# Altium PCB EN-C200_RA2.PcbDoc (part 2 of 3)
Units mil, origin at the board's own origin, x right, y up, seen from the top; angles counter-clockwise.
Board outline 4940 x 2525 mil, 2 copper layers (TOP, BOTTOM), stack 39.8 mil thick; 190 components, 128 nets, 643 pads, 1902 vias.
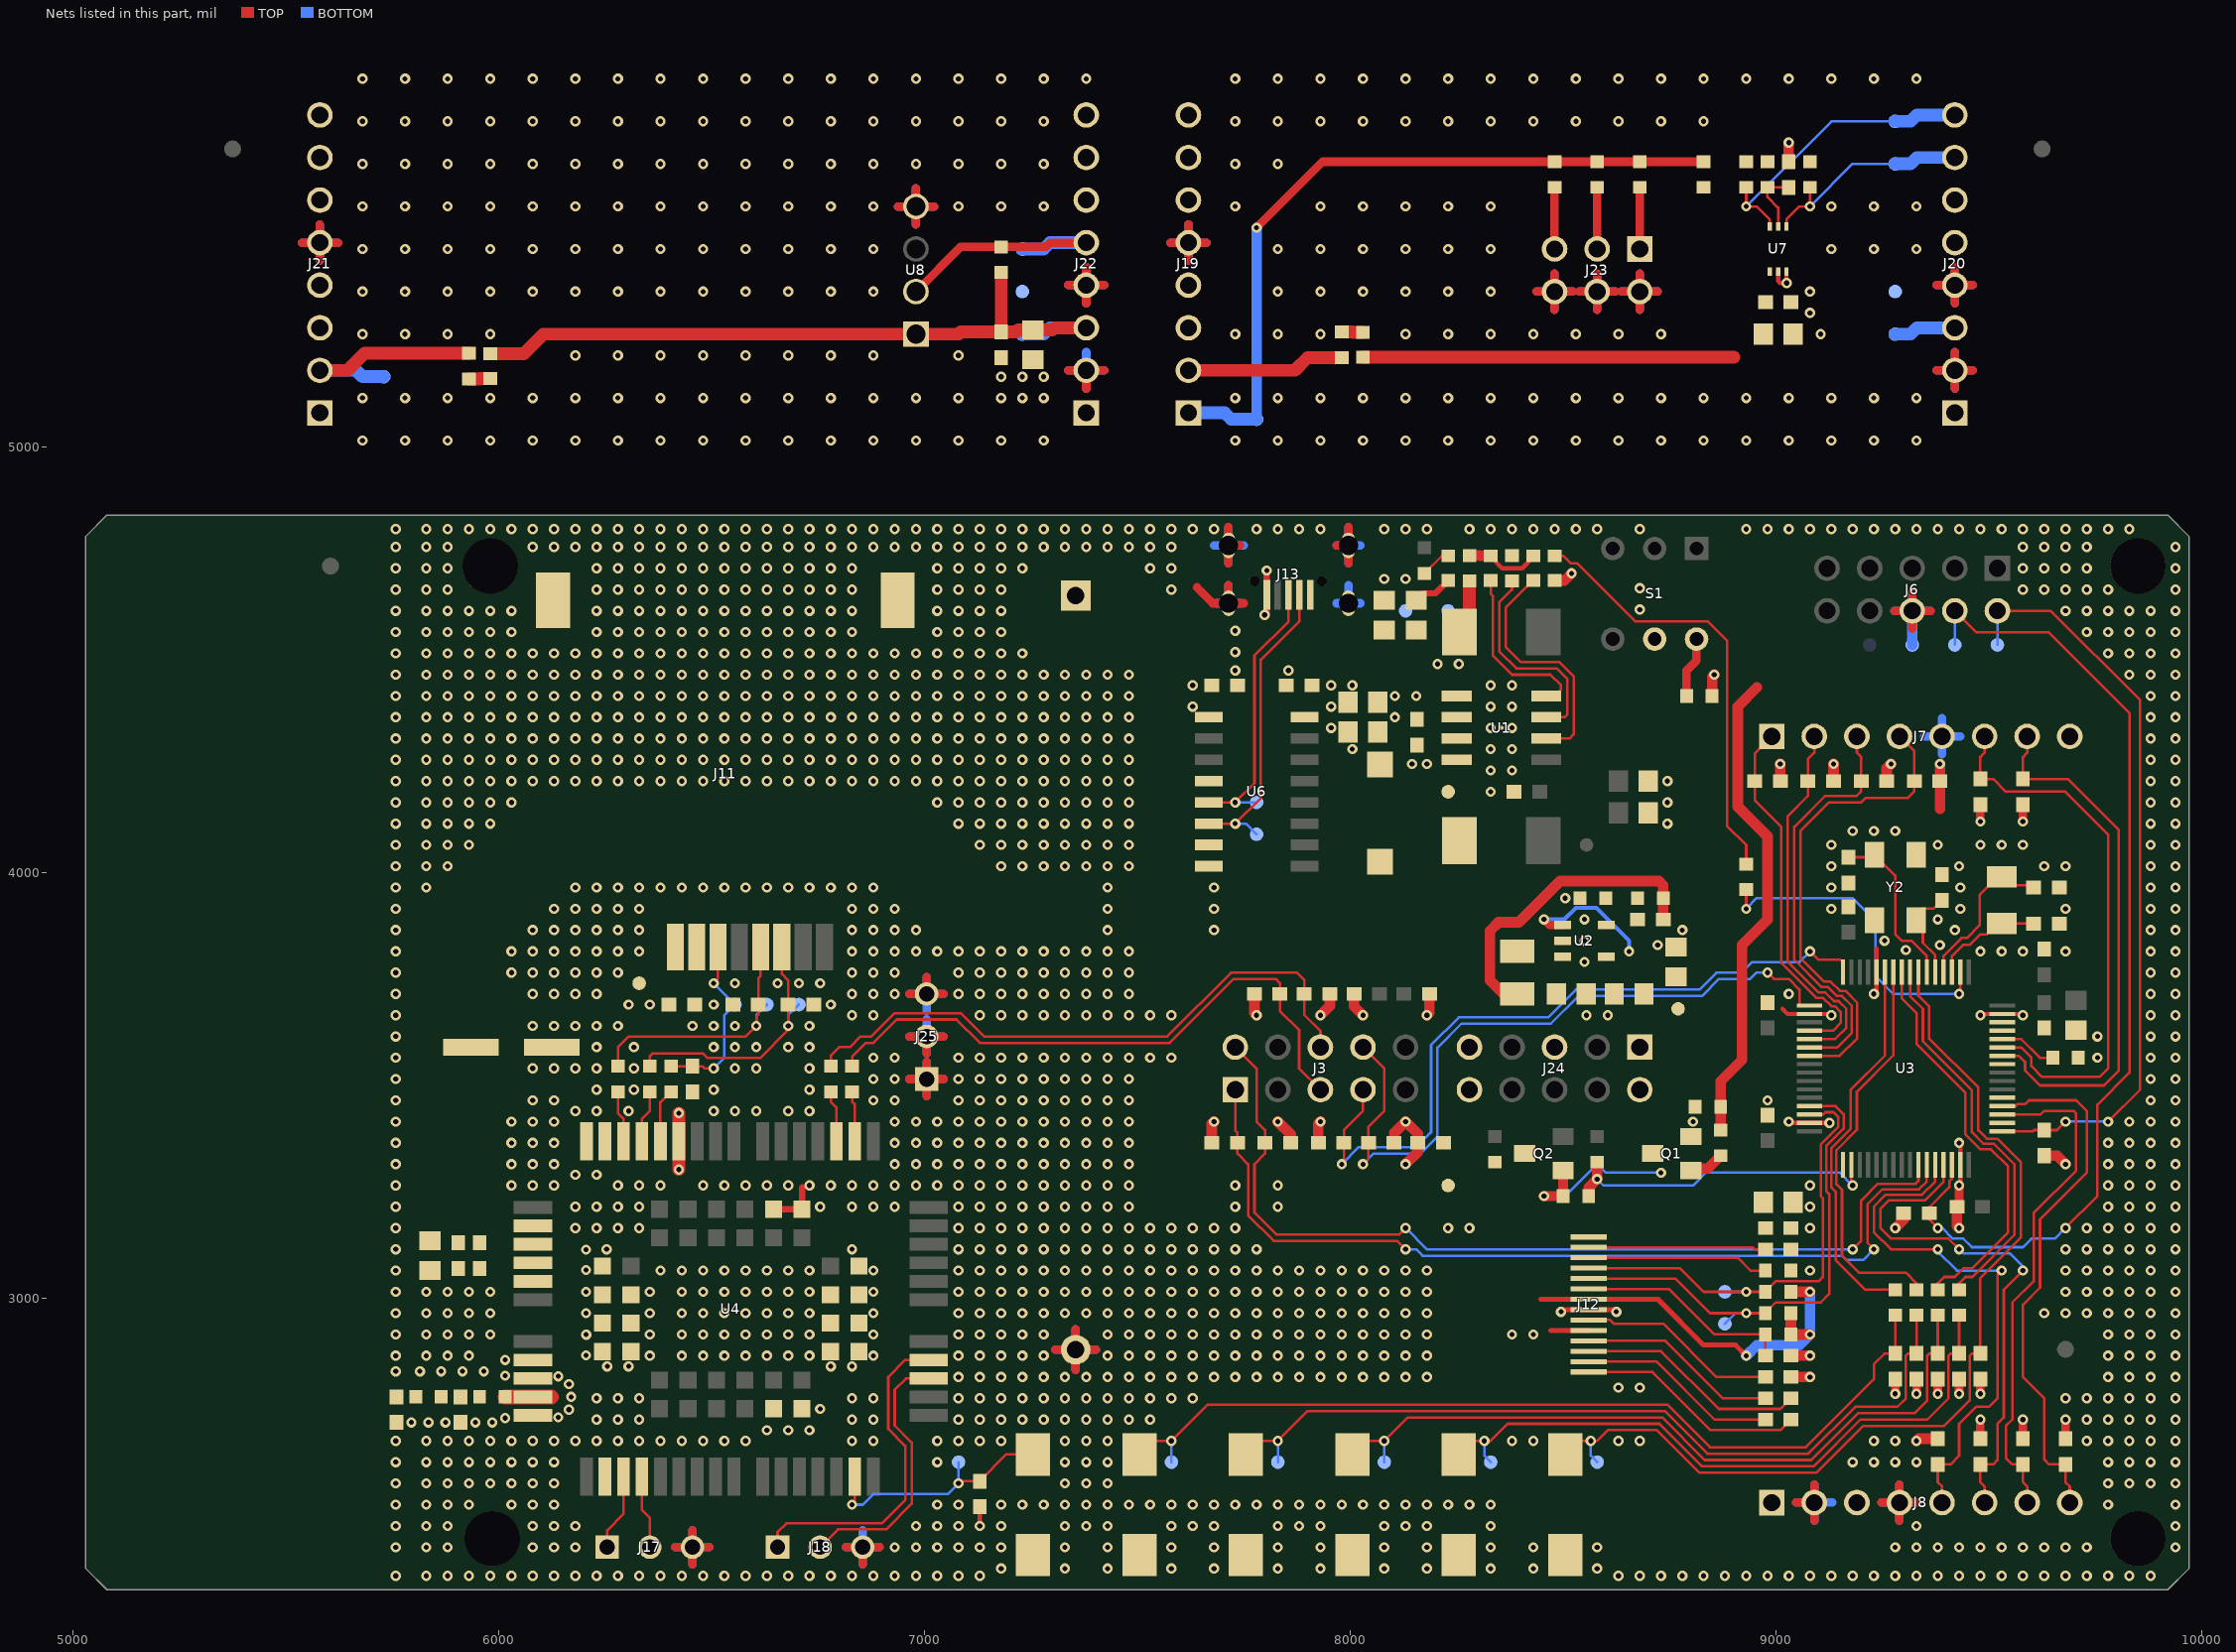
[diagram p2: the nets of this part, all layers, seen from the top]

## Via types
v1: diameter 24, hole 12, TOP to BOTTOM, tented both sides, 1902 vias

## Nets (pads, with @x,y where several pads share a name; then routed paths per layer and width w, separated by ;. In a path a pad name is that pad's centre, name@x,y a point inside that pad or via, vN(x,y) a via of type N, cw(c..) or ccw(c..) an arc to the next point about the centre after c; other vN are vias at no path point) (continued)
GND: C1.2 C2.2 C3.2 C4.2 C5.1 C8.2 C9.2 C11.2 C12.2 C13.1 C14.1 C15.2 C16.1 C17.1 C18.1 C19.1 C20.1 C21.2 C22.2 C23.2 C24.2 C25.2 C26.2 C28.1 C29.1 C30.1 C31.1 C32.1 C33.2 C34.2 C35.2 C36.2 C37.1 C39.1 C41.1 C42.1 C43.1 C44.1 C45.2 C46.1 C47.1 C48.1 C49.1 C50.1 C51.1 C52.1 C53.1 C54.1 C55.1 C56.1 C57.1 C58.1 C59.1 C60.1 C62.1 C63.1 C64.1 C65.1 C66.1 C67.1 C68.1 C69.1 C70.2 C71.2 C72.2 C73.2 C74.2 C75.2 C76.2 C77.2 E1.2 J6.6 J7.5 J8.2 J8.4 J11.2 J11.9 J11.10 J12.7 J13.5 J13.6 J13.7 J13.8 J13.9 J15.2 J17.3 J18.3 J19.5 J20.2 J20.4 J21.5 J22.2 J22.4 J23.2 J23.4 J23.6 J25.1 J25.2 J25.3 LED3.2 LED4.2 Q1.2 R2.1 R3.1 R5.1 R10.1 R27.1 R59.2 S2.2 S3.2 S4.2 S5.2 S6.2 S7.1 TP49.1 TP51.1 TP53.1 TP60.1 U1.7 U1.9 U2.2 U3.12 U3.18 U3.31 U3.47 U3.63 U4.2 U4.42 U4.43 U4.47 U4.48 U4.51 U4.52 U4.54 U4.59 U4.60 U4.61 U4.62 U4.63 U4.64 U4.65 U4.66 U4.71 U4.72 U4.73 U4.74 U4.81 U4.82 U4.83 U4.92 U4.93 U4.94 U6.1 U7.2 U7.3 U8.4 Y2.2 Y2.4 | length 10058.4
  TOP w10: v1(7130,2465) C37.1@7130,2510 ; U7.2@9005,5411.85 9005,5390 9010,5385 ; 9015,3680 9027.05,3667.95 U3.18@9078.62,3667.95 9127.05,3667.95 v1(9130,3665) ; v1@9024.68,5385.31 U7.3@9024.68,5411.85 ; v1(9030,3415) 9032.95,3412.05 U3.31@9078.62,3412.05 v1(9125.62,3412.05) 9127.05,3412.05 v1@9130,3415 ; v1(9230,3715) 9236.1,3721.1 U3.12@9236.1,3766.38 9236.1,3821.1 ; v1(9430,3265) 9432.95,3267.95 U3.47@9432.95,3313.62 9432.95,3362.05 v1(9430,3365) ; v1(9480,3665) 9482.95,3667.95 U3.63@9531.38,3667.95 9577.05,3667.95 v1(9580,3665)
  TOP w12: v1(8495,2968.14) 8500,2973.14 J12.7@8560.04,2973.14 8620,2973.14 v1(8625,2968.14)
  TOP w15: U4.66@6645.39,3209.25 U4.65@6712.32,3209.25 6712.32,3260 ; v1(7798.82,4605.56) 7803.82,4610.56 J13.5@7803.82,4652.56 v1(7803.82,4709.56) ; C1.2@8155,4640 8171.11,4656.11 8200.11,4656.11 LED3.2@8230,4686 ; v1@9024.68,5385.31 v1(9025,5385)
  TOP w20: 5537.5,5480 J21.5@5580,5480 ; 5580,5437.5 J21.5@5580,5480 ; 5580,5522.5 J21.5@5580,5480 ; 5622.5,5480 J21.5@5580,5480 ; 6415,2415 J17.3@6455,2415 ; 6455,2375 J17.3@6455,2415 ; 6455,2455 J17.3@6455,2415 ; 6495,2415 J17.3@6455,2415 ; 6815,2415 J18.3@6855,2415 ; 6855,2375 J18.3@6855,2415 ; 6895,2415 J18.3@6855,2415 ; 6937.5,5565 U8.4@6980,5565 ; 6965,3515 J25.1@7005,3515 ; 6965,3615 J25.2@7005,3615 ; 6965,3715 J25.3@7005,3715 ; 6980,5522.5 U8.4@6980,5565 ; 6980,5607.5 U8.4@6980,5565 ; 7005,3475 J25.1@7005,3515 ; 7005,3555 J25.1@7005,3515 ; 7005,3575 J25.2@7005,3615 ; 7005,3755 J25.3@7005,3715 ; 7022.5,5565 U8.4@6980,5565 ; 7045,3515 J25.1@7005,3515 ; 7045,3615 J25.2@7005,3615 ; 7045,3715 J25.3@7005,3715 ; 7307.5,2879.17 J15.2@7355,2879.17 ; 7337.5,5180 J22.2@7380,5180 ; 7337.5,5380 J22.4@7380,5380 ; 7355,2831.67 J15.2@7355,2879.17 ; 7355,2926.68 J15.2@7355,2879.17 ; 7380,5137.5 J22.2@7380,5180 ; 7380,5337.5 J22.4@7380,5380 ; 7380,5422.5 J22.4@7380,5380 ; 7402.5,2879.17 J15.2@7355,2879.17 ; 7422.5,5180 J22.2@7380,5180 ; 7422.5,5380 J22.4@7380,5380 ; 7577.5,5480 J19.5@7620,5480 ; 7620,5437.5 J19.5@7620,5480 ; 7620,5522.5 J19.5@7620,5480 ; 7640,4670 7677.13,4632.87 J13.9@7714.25,4632.87 ; 7662.5,5480 J19.5@7620,5480 ; 7714.25,4675.38 J13.9@7714.25,4632.87 ; 7714.25,4726.2 J13.8@7714.25,4768.7 ; 7714.25,4811.2 J13.8@7714.25,4768.7 ; 7741.75,4768.7 J13.8@7714.25,4768.7 ; 7750,4632.87 J13.9@7714.25,4632.87 ; 7968.25,4768.7 J13.7@7995.75,4768.7 ; 7995.75,4726.2 J13.7@7995.75,4768.7 ; 7995.75,4811.2 J13.7@7995.75,4768.7 ; 8437.5,5365 J23.6@8480,5365 ; 8480,5322.5 J23.6@8480,5365 ; 8480,5407.5 J23.6@8480,5365 ; 8522.5,5365 J23.6@8480,5365 ; 8537.5,5365 J23.4@8580,5365 ; 8580,5322.5 J23.4@8580,5365 ; 8580,5407.5 J23.4@8580,5365 ; 8622.5,5365 J23.4@8580,5365 ; 8637.5,5365 J23.2@8680,5365 ; 8680,5322.5 J23.2@8680,5365 ; 8680,5407.5 J23.2@8680,5365 ; 8722.5,5365 J23.2@8680,5365 ; 9047.5,2520 J8.2@9090,2520 ; 9090,2477.5 J8.2@9090,2520 ; 9090,2562.5 J8.2@9090,2520 ; 9247.5,2520 J8.4@9290,2520 ; 9277.5,4615 J6.6@9320,4615 ; v1(9280,2775.5) C26.2@9280,2810 ; 9290,2477.5 J8.4@9290,2520 ; 9290,2562.5 J8.4@9290,2520 ; 9320,4572.5 J6.6@9320,4615 ; 9320,4657.5 J6.6@9320,4615 ; v1(9330,2775.5) C25.2@9330,2810 ; 9332.5,2520 J8.4@9290,2520 ; 9362.5,4615 J6.6@9320,4615 ; 9377.5,5180 J20.2@9420,5180 ; 9377.5,5380 J20.4@9420,5380 ; v1(9380,2775.5) C24.2@9380,2810 ; 9420,5137.5 J20.2@9420,5180 ; 9420,5222.5 J20.2@9420,5180 ; 9420,5337.5 J20.4@9420,5380 ; 9420,5422.5 J20.4@9420,5380 ; C16.1@9425,3215 9430,3220 v1(9430,3265) ; v1(9430,2775.5) C23.2@9430,2810 ; 9462.5,5180 J20.2@9420,5180 ; 9462.5,5380 J20.4@9420,5380 ; C66.1@9480,2670 v1(9480,2715) ; v1(9480,2775.5) C22.2@9480,2810 ; v1(9480,4120) C62.1@9480,4160 ; C65.1@9580,2670 v1(9580,2715) ; v1(9580,4120) C63.1@9580,4160 ; C64.1@9680,2670 v1(9680,2715)
  TOP w24: LED4.2@8480,4686 8503,4686 v1(8520,4703)
  TOP w25: C49.1@7675,3365 7675,3410 v1(7680,3415) ; C51.1@7775,3715 7775,3670 v1(7780,3665) ; v1(7830,3415) 7860,3385 C56.1@7860,3365 ; C52.1@7925,3365 7925,3410 v1(7930,3415) ; v1(7930,3665) 7952,3687 C54.1@7952,3715 ; C50.1@8009,3715 8009,3686 v1(8030,3665) ; C53.1@8103,3365 8103,3388 v1(8130,3415) 8159,3386 C39.1@8159,3365 8159,3344 v1(8130,3315) ; v1(8180,3665) 8186,3671 C55.1@8186,3715 ; R3.1@8850,4415 8850,4460 v1(8855,4465) ; C57.1@9010,4215 v1(9010,4255) ; C73.2@9030,5670 v1(9030,5715) ; C41.1@9035,2815 v1(9080,2815) ; C43.1@9035,2865 v1(9080,2865) ; C58.1@9135,4215 v1(9135,4255) ; C59.1@9260,4215 9260,4245 v1(9270,4255) ; v1(9280,3165) 9300,3185 C68.1@9300,3200 ; v1(9330,2665) 9335,2670 C67.1@9380,2670 ; 9385,4150 v1(9385,4255) ; C16.1@9425,3215 9425,3170 v1(9430,3165) ; C69.1@9630,3335 9660,3335 v1(9680,3315)
  BOTTOM w20: 5537.5,5480 J21.5@5580,5480 ; 5580,5437.5 J21.5@5580,5480 ; 5580,5522.5 J21.5@5580,5480 ; 5622.5,5480 J21.5@5580,5480 ; 6415,2415 J17.3@6455,2415 ; 6455,2375 J17.3@6455,2415 ; 6455,2455 J17.3@6455,2415 ; 6495,2415 J17.3@6455,2415 ; 6815,2415 J18.3@6855,2415 ; 6855,2375 J18.3@6855,2415 ; 6855,2455 J18.3@6855,2415 ; 6895,2415 J18.3@6855,2415 ; 6937.5,5565 U8.4@6980,5565 ; 6965,3515 J25.1@7005,3515 ; 6965,3615 J25.2@7005,3615 ; 6965,3715 J25.3@7005,3715 ; 6980,5522.5 U8.4@6980,5565 ; 6980,5607.5 U8.4@6980,5565 ; 7005,3475 J25.1@7005,3515 ; 7005,3555 J25.1@7005,3515 ; 7005,3575 J25.2@7005,3615 ; 7005,3655 J25.2@7005,3615 ; 7005,3675 J25.3@7005,3715 ; 7005,3755 J25.3@7005,3715 ; 7022.5,5565 U8.4@6980,5565 ; 7045,3515 J25.1@7005,3515 ; 7045,3615 J25.2@7005,3615 ; 7045,3715 J25.3@7005,3715 ; 7307.5,2879.17 J15.2@7355,2879.17 ; 7337.5,5180 J22.2@7380,5180 ; 7337.5,5380 J22.4@7380,5380 ; 7355,2831.67 J15.2@7355,2879.17 ; 7355,2926.68 J15.2@7355,2879.17 ; 7380,5137.5 J22.2@7380,5180 ; 7380,5222.5 J22.2@7380,5180 ; 7380,5337.5 J22.4@7380,5380 ; 7380,5422.5 J22.4@7380,5380 ; 7402.5,2879.17 J15.2@7355,2879.17 ; 7422.5,5180 J22.2@7380,5180 ; 7422.5,5380 J22.4@7380,5380 ; 7577.5,5480 J19.5@7620,5480 ; 7620,5437.5 J19.5@7620,5480 ; 7620,5522.5 J19.5@7620,5480 ; 7662.5,5480 J19.5@7620,5480 ; 7680,4768.7 J13.8@7714.25,4768.7 ; 7686.75,4632.87 J13.9@7714.25,4632.87 ; 7714.25,4675.38 J13.9@7714.25,4632.87 ; 7714.25,4726.2 J13.8@7714.25,4768.7 ; 7714.25,4811.2 J13.8@7714.25,4768.7 ; 7741.75,4632.87 J13.9@7714.25,4632.87 ; 7750,4768.7 J13.8@7714.25,4768.7 ; 7968.25,4632.87 J13.6@7995.75,4632.87 ; 7968.25,4768.7 J13.7@7995.75,4768.7 ; 7995.75,4675.38 J13.6@7995.75,4632.87 ; 7995.75,4726.2 J13.7@7995.75,4768.7 ; 7995.75,4811.2 J13.7@7995.75,4768.7 ; 8023.25,4632.87 J13.6@7995.75,4632.87 ; 8023.25,4768.7 J13.7@7995.75,4768.7 ; 8437.5,5365 J23.6@8480,5365 ; 8480,5322.5 J23.6@8480,5365 ; 8480,5407.5 J23.6@8480,5365 ; 8522.5,5365 J23.6@8480,5365 ; 8537.5,5365 J23.4@8580,5365 ; 8580,5322.5 J23.4@8580,5365 ; 8580,5407.5 J23.4@8580,5365 ; 8622.5,5365 J23.4@8580,5365 ; 8637.5,5365 J23.2@8680,5365 ; 8680,5322.5 J23.2@8680,5365 ; 8680,5407.5 J23.2@8680,5365 ; 8722.5,5365 J23.2@8680,5365 ; 9047.5,2520 J8.2@9090,2520 ; 9090,2477.5 J8.2@9090,2520 ; 9090,2562.5 J8.2@9090,2520 ; 9132.5,2520 J8.2@9090,2520 ; 9247.5,2520 J8.4@9290,2520 ; 9277.5,4615 J6.6@9320,4615 ; 9290,2477.5 J8.4@9290,2520 ; 9290,2562.5 J8.4@9290,2520 ; 9320,4657.5 J6.6@9320,4615 ; 9332.5,2520 J8.4@9290,2520 ; 9347.5,4320 J7.5@9390,4320 ; 9362.5,4615 J6.6@9320,4615 ; 9377.5,5180 J20.2@9420,5180 ; 9377.5,5380 J20.4@9420,5380 ; 9390,4277.5 J7.5@9390,4320 ; 9390,4362.5 J7.5@9390,4320 ; 9420,5137.5 J20.2@9420,5180 ; 9420,5222.5 J20.2@9420,5180 ; 9420,5337.5 J20.4@9420,5380 ; 9420,5422.5 J20.4@9420,5380 ; 9432.5,4320 J7.5@9390,4320 ; 9462.5,5180 J20.2@9420,5180 ; 9462.5,5380 J20.4@9420,5380
  BOTTOM w25: TP49.1@9320,4535 J6.6@9320,4615
  other v1: 5758,2348 5830,2348 5880,2348 5930,2348 5980,2348 6030,2348 6080,2348 6130,2348 6180,2348 6230,2348 6280,2348 6330,2348 6380,2348 6430,2348 6480,2348 6530,2348 6580,2348 6630,2348 6680,2348 6730,2348 6780,2348 6830,2348 6880,2348 6930,2348 6980,2348 7030,2348 7080,2348 7130,2348 8630,2348 8680,2348 8730,2348 8780,2348 8830,2348 8880,2348 8930,2348 8980,2348 9030,2348 9080,2348 9130,2348 9180,2348 9230,2348 9280,2348 9330,2348 9380,2348 9430,2348 9480,2348 9530,2348 9580,2348 9630,2348 9680,2348 9730,2348 9780,2348 9830,2348 9880,2348 7180,2365 7330,2365 7430,2365 7580,2365 7680,2365 7830,2365 7930,2365 8080,2365 8180,2365 8330,2365 8430,2365 8580,2365 5758,2415 5830,2415 5880,2415 6080,2415 6130,2415 6180,2415 6930,2415 6980,2415 7030,2415 7080,2415 7130,2415 7180,2415 7330,2415 7430,2415 7580,2415 7680,2415 7830,2415 7930,2415 8080,2415 8180,2415 8330,2415 8430,2415 8580,2415 9280,2415 9330,2415 9380,2415 9430,2415 9480,2415 9530,2415 9580,2415 9630,2415 9680,2415 9730,2415 9938,2415 5758,2465 5830,2465 5880,2465 6080,2465 6130,2465 6180,2465 6980,2465 7030,2465 7080,2465 7180,2465 7330,2465 7380,2465 7430,2465 7580,2465 7630,2465 7680,2465 7830,2465 7880,2465 7930,2465 8080,2465 8130,2465 8180,2465 8330,2465 9330,2465 9938,2465 5758,2515 5830,2515 5880,2515 5930,2515 6030,2515 6080,2515 6130,2515 7030,2515 7080,2515 7180,2515 7230,2515 7280,2515 7330,2515 7380,2515 7430,2515 7480,2515 7530,2515 7580,2515 7630,2515 7680,2515 7730,2515 7780,2515 7830,2515 7880,2515 7930,2515 7980,2515 8030,2515 8080,2515 8130,2515 8180,2515 8230,2515 8280,2515 8330,2515 9780,2515 9938,2515 5758,2565 5830,2565 5880,2565 5930,2565 5980,2565 6030,2565 6080,2565 6130,2565 7330,2565 7380,2565 7430,2565 9780,2565 9830,2565 9880,2565 9938,2565 5758,2615 5830,2615 5880,2615 5930,2615 5980,2615 6030,2615 6080,2615 6130,2615 7030,2615 7330,2615 7380,2615 7430,2615 9180,2615 9230,2615 9280,2615 9330,2615 9780,2615 9830,2615 9880,2615 9938,2615 5758,2665 5830,2665 5880,2665 5930,2665 5980,2665 6030,2665 6080,2665 6130,2665 6180,2665 6230,2665 6280,2665 6330,2665 6380,2665 6430,2665 6480,2665 6530,2665 6580,2665 6830,2665 6880,2665 7030,2665 7080,2665 7130,2665 7180,2665 7330,2665 7380,2665 7430,2665 9230,2665 9280,2665 9730,2665 9780,2665 9830,2665 9880,2665 9938,2665 6630,2690 6680,2690 6730,2690 5795,2708.31 5835,2708.31 5875,2708.31 5945,2708.31 5985,2708.31 6230,2715 6280,2715 6330,2715 6830,2715 6880,2715 7080,2715 7130,2715 7180,2715 7230,2715 7280,2715 7330,2715 7380,2715 7430,2715 7480,2715 7530,2715 9730,2715 9780,2715 9830,2715 9880,2715 9938,2715 6015,2718.31 6140,2720 6165,2738.31 6755,2740 6230,2765 6280,2765 6330,2765 6830,2765 6880,2765 7080,2765 7130,2765 7180,2765 7230,2765 7280,2765 7330,2765 7380,2765 7430,2765 7480,2765 7530,2765 7580,2765 7630,2765 9680,2765 9730,2765 9780,2765 9830,2765 9880,2765 9938,2765 6170,2768.31 6165,2798.31 7080,2815 7130,2815 7180,2815 7230,2815 7280,2815 7330,2815 7380,2815 7430,2815 7480,2815 7530,2815 7580,2815 7630,2815 7680,2815 7730,2815 7780,2815 7830,2815 7880,2815 7930,2815 7980,2815 8030,2815 8080,2815 8130,2815 8180,2815 9780,2815 9830,2815 9880,2815 9938,2815 6140,2816.61 6015,2818.31 5758,2828.31 5815,2828.31 5865,2828.31 5915,2828.31 5965,2828.31 6255,2840 6305,2840 6780,2840 6830,2840 6015,2855 5758,2865 5830,2865 5880,2865 5930,2865 6355,2865 6430,2865 6480,2865 6530,2865 6580,2865 6630,2865 6680,2865 6730,2865 6880,2865 7080,2865 7130,2865 7180,2865 7230,2865 7280,2865 7430,2865 7480,2865 7530,2865 7580,2865 7630,2865 7680,2865 7730,2865 7780,2865 7830,2865 7880,2865 7930,2865 7980,2865 8030,2865 8080,2865 8130,2865 8180,2865 9780,2865 9830,2865 9880,2865 9938,2865 6205,2865.79 6205.54,2914.46 5758,2915 5830,2915 5880,2915 5930,2915 5980,2915 6355,2915 6430,2915 6480,2915 6530,2915 6580,2915 6630,2915 6680,2915 6730,2915 6880,2915 7080,2915 7130,2915 7180,2915 7230,2915 7280,2915 7430,2915 7480,2915 7530,2915 7580,2915 7630,2915 7680,2915 7730,2915 7780,2915 7830,2915 7880,2915 7930,2915 7980,2915 8030,2915 8080,2915 8130,2915 8180,2915 9780,2915 9830,2915 9880,2915 9938,2915 5758,2965 5830,2965 5880,2965 5930,2965 5980,2965 6205,2965 6355,2965 6430,2965 6480,2965 6530,2965 6580,2965 6630,2965 6680,2965 6730,2965 6880,2965 7080,2965 7130,2965 7180,2965 7230,2965 7280,2965 7330,2965 7380,2965 7430,2965 7480,2965 7530,2965 7580,2965 7630,2965 7680,2965 7730,2965 7780,2965 7830,2965 7880,2965 7930,2965 7980,2965 8030,2965 8080,2965 8130,2965 8180,2965 9630,2965 9680,2965 9730,2965 9780,2965 9830,2965 9880,2965 9938,2965 5758,3015 5830,3015 5880,3015 5930,3015 5980,3015 6205,3015 6355,3015 6430,3015 6480,3015 6530,3015 6580,3015 6630,3015 6680,3015 6730,3015 6880,3015 7080,3015 7130,3015 7180,3015 7230,3015 7280,3015 7330,3015 7380,3015 7430,3015 7480,3015 7530,3015 7580,3015 7630,3015 7680,3015 7730,3015 7780,3015 7830,3015 7880,3015 7930,3015 7980,3015 8030,3015 8080,3015 8130,3015 8180,3015 9680,3015 9730,3015 9780,3015 9830,3015 9880,3015 9938,3015 5758,3065 6380,3065 6430,3065 6480,3065 6530,3065 6580,3065 6630,3065 6680,3065 6730,3065 6880,3065 7080,3065 7130,3065 7180,3065 7230,3065 7280,3065 7330,3065 7380,3065 7430,3065 7480,3065 7530,3065 7580,3065 7630,3065 7680,3065 7730,3065 7780,3065 7830,3065 7880,3065 7930,3065 7980,3065 8030,3065 8080,3065 8130,3065 8180,3065 9080,3065 9680,3065 9730,3065 9780,3065 9830,3065 9880,3065 9938,3065 6205,3066.57 6205,3114.21 5758,3115 6253.43,3115 6830,3115 7080,3115 7130,3115 7180,3115 7230,3115 7280,3115 7330,3115 7380,3115 7430,3115 7480,3115 7530,3115 7580,3115 7630,3115 7680,3115 7730,3115 7780,3115 9680,3115 9730,3115 9780,3115 9830,3115 9880,3115 9938,3115 5758,3165 6180,3165 6230,3165 6280,3165 6330,3165 7080,3165 7130,3165 7180,3165 7230,3165 7280,3165 7330,3165 7380,3165 7430,3165 7480,3165 7530,3165 7580,3165 7630,3165 7680,3165 7730,3165 9080,3165 9730,3165 9780,3165 9830,3165 9880,3165 9938,3165 5758,3215 6180,3215 6230,3215 6280,3215 6330,3215 6755,3215 6830,3215 6880,3215 6930,3215 7080,3215 7130,3215 7180,3215 7230,3215 7280,3215 7330,3215 7380,3215 7430,3215 7480,3215 9080,3215 9780,3215 9830,3215 9880,3215 9938,3215 5758,3265 6030,3265 6080,3265 6130,3265 6280,3265 6330,3265 6380,3265 6480,3265 6530,3265 6580,3265 6630,3265 6680,3265 6730,3265 6780,3265 6830,3265 6880,3265 6930,3265 6980,3265 7030,3265 7080,3265 7130,3265 7180,3265 7230,3265 7280,3265 7330,3265 7380,3265 7430,3265 7480,3265 9080,3265 9780,3265 9830,3265 9880,3265 9938,3265 6180,3290 6230,3290 5758,3315 6030,3315 6080,3315 6130,3315 6930,3315 6980,3315 7030,3315 7080,3315 7130,3315 7180,3315 7230,3315 7280,3315 7330,3315 7380,3315 7430,3315 7480,3315 9780,3315 9830,3315 9880,3315 9938,3315 5758,3365 6030,3365 6080,3365 6130,3365 6930,3365 6980,3365 7030,3365 7080,3365 7130,3365 7180,3365 7230,3365 7280,3365 7330,3365 7380,3365 7430,3365 7480,3365 9780,3365 9830,3365 9880,3365 9938,3365 5758,3415 6030,3415 6080,3415 6130,3415 6930,3415 6980,3415 7030,3415 7080,3415 7130,3415 7180,3415 7230,3415 7280,3415 7330,3415 7380,3415 7430,3415 7480,3415 8805,3415 9830,3415 9880,3415 9938,3415 6180,3440 6230,3440 6305,3440 6505,3440 6555,3440 6605,3440 6680,3440 6730,3440 5758,3465 6080,3465 6130,3465 6880,3465 6930,3465 7080,3465 7130,3465 7180,3465 7230,3465 7280,3465 7330,3465 7380,3465 7430,3465 7480,3465 8980,3465 9880,3465 9938,3465 6230,3490 6317.5,3490 6505,3490 6730,3490 5758,3515 6880,3515 6930,3515 7080,3515 7130,3515 7180,3515 7230,3515 7280,3515 7330,3515 7380,3515 7430,3515 7480,3515 9880,3515 9938,3515 6080,3540 6130,3540 6180,3540 6230,3540 6317.5,3540 6555,3540 6605,3540 6730,3540 5758,3565 6880,3565 6930,3565 7080,3565 7130,3565 7180,3565 7230,3565 7280,3565 7330,3565 7380,3565 7430,3565 7480,3565 9755,3565 9880,3565 9938,3565 6230,3590 6317.5,3590 6505,3590 6555,3590 6605,3590 6680,3590 6730,3590 5758,3615 9755,3615 9880,3615 9938,3615 6080,3640 6130,3640 6180,3640 6230,3640 6280,3640 6455,3640 6505,3640 6555,3640 6730,3640 5758,3665 6830,3665 6880,3665 7130,3665 7180,3665 7230,3665 7280,3665 7330,3665 7380,3665 7430,3665 7480,3665 8555,3665 8605,3665 9880,3665 9938,3665 6505,3690 6780,3690 5758,3715 6080,3715 6130,3715 6180,3715 6230,3715 6830,3715 6880,3715 6930,3715 7080,3715 7130,3715 7180,3715 7230,3715 7280,3715 7330,3715 7380,3715 7430,3715 7480,3715 9030,3715 9880,3715 9938,3715 6555,3740 6655,3740 6705,3740 6755,3740 5758,3765 6030,3765 6080,3765 6130,3765 6180,3765 6230,3765 6280,3765 6830,3765 6880,3765 6930,3765 7080,3765 7130,3765 7180,3765 7230,3765 7280,3765 7330,3765 7380,3765 7430,3765 7480,3765 9880,3765 9938,3765 8550,3790 5758,3815 6030,3815 6080,3815 6130,3815 6180,3815 6230,3815 6280,3815 6330,3815 6830,3815 6880,3815 6930,3815 6980,3815 7030,3815 7080,3815 7130,3815 7180,3815 7230,3815 7280,3815 7330,3815 7380,3815 7430,3815 7480,3815 9480,3815 9530,3815 9580,3815 9680,3815 9880,3815 9938,3815 9305,3818 8722,3830 9385,3830 8550,3840 9255,3840 5758,3865 6080,3865 6130,3865 6180,3865 6230,3865 6280,3865 6330,3865 6830,3865 6880,3865 6930,3865 6980,3865 8780,3865 9420,3865 9880,3865 9938,3865 8550,3890 9380,3890 5758,3915 6130,3915 6180,3915 6230,3915 6280,3915 6330,3915 6830,3915 6880,3915 6930,3915 9130,3915 9433,3915 9680,3915 9880,3915 9938,3915 8505,3940 5758,3965 5830,3965 6180,3965 6230,3965 6280,3965 6330,3965 6380,3965 6430,3965 6480,3965 6530,3965 6580,3965 6630,3965 6680,3965 6730,3965 6780,3965 6830,3965 6880,3965 9130,3965 9433,3965 9880,3965 9938,3965 5758,4015 5830,4015 5880,4015 7180,4015 7230,4015 7280,4015 7330,4015 7380,4015 7430,4015 7480,4015 9130,4015 9430,4015 9630,4015 9680,4015 9880,4015 9938,4015 5758,4065 5830,4065 5880,4065 5930,4065 7130,4065 7180,4065 7230,4065 7280,4065 7330,4065 7380,4065 7430,4065 7480,4065 9130,4065 9380,4065 9480,4065 9530,4065 9580,4065 9880,4065 9938,4065 9180,4098 9230,4098 9280,4098 5758,4115 5830,4115 5880,4115 5930,4115 5980,4115 7080,4115 7130,4115 7180,4115 7230,4115 7280,4115 7330,4115 7380,4115 7430,4115 7480,4115 8745,4115 9880,4115 9938,4115 5758,4165 5830,4165 5880,4165 5930,4165 5980,4165 6030,4165 7030,4165 7080,4165 7130,4165 7180,4165 7230,4165 7280,4165 7330,4165 7380,4165 7430,4165 7480,4165 8745,4165 9880,4165 9938,4165 8330,4190 5758,4215 5830,4215 5880,4215 5930,4215 5980,4215 6030,4215 6080,4215 6130,4215 6180,4215 6230,4215 6280,4215 6330,4215 6380,4215 6430,4215 6480,4215 6530,4215 6580,4215 6630,4215 6680,4215 6730,4215 6780,4215 6830,4215 6880,4215 6930,4215 6980,4215 7030,4215 7080,4215 7130,4215 7180,4215 7230,4215 7280,4215 7330,4215 7380,4215 7430,4215 7480,4215 8745,4215 9880,4215 9938,4215 8330,4240 8380,4240 8145,4255 8180,4255 5758,4265 5830,4265 5880,4265 5930,4265 5980,4265 6030,4265 6080,4265 6130,4265 6180,4265 6230,4265 6280,4265 6330,4265 6380,4265 6430,4265 6480,4265 6530,4265 6580,4265 6630,4265 6680,4265 6730,4265 6780,4265 6830,4265 6880,4265 6930,4265 6980,4265 7030,4265 7080,4265 7130,4265 7180,4265 7230,4265 7280,4265 7330,4265 7380,4265 7430,4265 7480,4265 9880,4265 9938,4265 8005,4290 8330,4290 8380,4290 5758,4315 5830,4315 5880,4315 5930,4315 5980,4315 6030,4315 6080,4315 6130,4315 6180,4315 6230,4315 6280,4315 6330,4315 6380,4315 6430,4315 6480,4315 6530,4315 6580,4315 6630,4315 6680,4315 6730,4315 6780,4315 6830,4315 6880,4315 6930,4315 6980,4315 7030,4315 7080,4315 7130,4315 7180,4315 7230,4315 7280,4315 7330,4315 7380,4315 7430,4315 7480,4315 9880,4315 9938,4315 7955,4340 8330,4340 8380,4340 5758,4365 5830,4365 5880,4365 5930,4365 5980,4365 6030,4365 6080,4365 6130,4365 6180,4365 6230,4365 6280,4365 6330,4365 6380,4365 6430,4365 6480,4365 6530,4365 6580,4365 6630,4365 6680,4365 6730,4365 6780,4365 6830,4365 6880,4365 6930,4365 6980,4365 7030,4365 7080,4365 7130,4365 7180,4365 7230,4365 7280,4365 7330,4365 7380,4365 7430,4365 7480,4365 9880,4365 9938,4365 7630,4390 7955,4390 8330,4390 8380,4390 5758,4415 5830,4415 5880,4415 5930,4415 5980,4415 6030,4415 6080,4415 6130,4415 6180,4415 6230,4415 6280,4415 6330,4415 6380,4415 6430,4415 6480,4415 6530,4415 6580,4415 6630,4415 6680,4415 6730,4415 6780,4415 6830,4415 6880,4415 6930,4415 6980,4415 7030,4415 7080,4415 7130,4415 7180,4415 7230,4415 7280,4415 7330,4415 7380,4415 7430,4415 7480,4415 9880,4415 9938,4415 7630,4440 7955,4440 8005,4440 8330,4440 8380,4440 5758,4465 5830,4465 5880,4465 5930,4465 5980,4465 6030,4465 6080,4465 6130,4465 6180,4465 6230,4465 6280,4465 6330,4465 6380,4465 6430,4465 6480,4465 6530,4465 6580,4465 6630,4465 6680,4465 6730,4465 6780,4465 6830,4465 6880,4465 6930,4465 6980,4465 7030,4465 7080,4465 7130,4465 7180,4465 7230,4465 7280,4465 7330,4465 7380,4465 7430,4465 7480,4465 9830,4465 9880,4465 9938,4465 5758,4515 5830,4515 5880,4515 5930,4515 5980,4515 6030,4515 6080,4515 6130,4515 6180,4515 6230,4515 6280,4515 6330,4515 6380,4515 6430,4515 6480,4515 6530,4515 6580,4515 6630,4515 6680,4515 6730,4515 6780,4515 6830,4515 6880,4515 6930,4515 6980,4515 7030,4515 7080,4515 7130,4515 7180,4515 7230,4515 9780,4515 9830,4515 9880,4515 9938,4515 5758,4565 5830,4565 5880,4565 5930,4565 5980,4565 6030,4565 6230,4565 6280,4565 6330,4565 6380,4565 6430,4565 6480,4565 6530,4565 6580,4565 6630,4565 6680,4565 6730,4565 6780,4565 6830,4565 7030,4565 7080,4565 7130,4565 7180,4565 9730,4565 9780,4565 9830,4565 9880,4565 9938,4565 5758,4615 5830,4615 5880,4615 5930,4615 5980,4615 6030,4615 6230,4615 6280,4615 6330,4615 6380,4615 6430,4615 6480,4615 6530,4615 6580,4615 6630,4615 6680,4615 6730,4615 6780,4615 6830,4615 7030,4615 7080,4615 7130,4615 7180,4615 9680,4615 9730,4615 9780,4615 9830,4615 9880,4615 9938,4615 5758,4665 5830,4665 5880,4665 6230,4665 6280,4665 6330,4665 6380,4665 6430,4665 6480,4665 6530,4665 6580,4665 6630,4665 6680,4665 6730,4665 6780,4665 6830,4665 7030,4665 7080,4665 7130,4665 7180,4665 7580,4665 9580,4665 9630,4665 9680,4665 9730,4665 9780,4665 9938,4665 8080,4690 8130,4690 5758,4715 5830,4715 5880,4715 6230,4715 6280,4715 6330,4715 6380,4715 6430,4715 6480,4715 6530,4715 6580,4715 6630,4715 6680,4715 6730,4715 6780,4715 6830,4715 7030,4715 7080,4715 7130,4715 7180,4715 7230,4715 7530,4715 7580,4715 9580,4715 9630,4715 9680,4715 9730,4715 9938,4715 5758,4765 5830,4765 5880,4765 6080,4765 6130,4765 6180,4765 6230,4765 6280,4765 6330,4765 6380,4765 6430,4765 6480,4765 6530,4765 6580,4765 6630,4765 6680,4765 6730,4765 6780,4765 6830,4765 6880,4765 6930,4765 6980,4765 7030,4765 7080,4765 7130,4765 7180,4765 7230,4765 7280,4765 7330,4765 7380,4765 7430,4765 7480,4765 7530,4765 7580,4765 9580,4765 9630,4765 9680,4765 9730,4765 9938,4765 5758,4807 5830,4807 5880,4807 5930,4807 5980,4807 6030,4807 6080,4807 6130,4807 6180,4807 6230,4807 6280,4807 6330,4807 6380,4807 6430,4807 6480,4807 6530,4807 6580,4807 6630,4807 6680,4807 6730,4807 6780,4807 6830,4807 6880,4807 6930,4807 6980,4807 7030,4807 7080,4807 7130,4807 7180,4807 7230,4807 7280,4807 7330,4807 7380,4807 7430,4807 7480,4807 7530,4807 7580,4807 7630,4807 7680,4807 7780,4807 7830,4807 7880,4807 7930,4807 8080,4807 8130,4807 8180,4807 8280,4807 8330,4807 8380,4807 8430,4807 8480,4807 8530,4807 8580,4807 8680,4807 8930,4807 8980,4807 9030,4807 9080,4807 9130,4807 9180,4807 9230,4807 9280,4807 9330,4807 9380,4807 9430,4807 9480,4807 9530,4807 9580,4807 9630,4807 9680,4807 9730,4807 9780,4807 9830,4807 5680,5015 5780,5015 5880,5015 5980,5015 6080,5015 6180,5015 6280,5015 6380,5015 6480,5015 6580,5015 6680,5015 6780,5015 6880,5015 6980,5015 7080,5015 7180,5015 7280,5015 7730,5015 7830,5015 7930,5015 8030,5015 8130,5015 8230,5015 8330,5015 8430,5015 8530,5015 8630,5015 8730,5015 8830,5015 8930,5015 9030,5015 9130,5015 9230,5015 9330,5015 5680,5115 5780,5115 5880,5115 5980,5115 6080,5115 6180,5115 6280,5115 6380,5115 6480,5115 6580,5115 6680,5115 6780,5115 6880,5115 6980,5115 7080,5115 7180,5115 7230,5115 7280,5115 7730,5115 7830,5115 7930,5115 8030,5115 8130,5115 8230,5115 8330,5115 8430,5115 8530,5115 8630,5115 8730,5115 8830,5115 8930,5115 9030,5115 9130,5115 9230,5115 9330,5115 7180,5165 7230,5165 7280,5165 6180,5215 6280,5215 6380,5215 6480,5215 6580,5215 6680,5215 6780,5215 6880,5215 7080,5215 5680,5265 5780,5265 5880,5265 5980,5265 7730,5265 7830,5265 7930,5265 8130,5265 8230,5265 8330,5265 8430,5265 8530,5265 8630,5265 8730,5265 9105,5265 9080,5315 5680,5365 5780,5365 5880,5365 5980,5365 6080,5365 6180,5365 6280,5365 6380,5365 6480,5365 6580,5365 6680,5365 6780,5365 6880,5365 7830,5365 7930,5365 8030,5365 8130,5365 8230,5365 8330,5365 9080,5365 5680,5465 5780,5465 5880,5465 5980,5465 6080,5465 6180,5465 6280,5465 6380,5465 6480,5465 6580,5465 6680,5465 6780,5465 6880,5465 7830,5465 7930,5465 8030,5465 8130,5465 8230,5465 8330,5465 9130,5465 9230,5465 9330,5465 5680,5565 5780,5565 5880,5565 5980,5565 6080,5565 6180,5565 6280,5565 6380,5565 6480,5565 6580,5565 6680,5565 6780,5565 6880,5565 7080,5565 7180,5565 7280,5565 7730,5565 7930,5565 8030,5565 8130,5565 8230,5565 8330,5565 9130,5565 9230,5565 9330,5565 5680,5665 5780,5665 5880,5665 5980,5665 6080,5665 6180,5665 6280,5665 6380,5665 6480,5665 6580,5665 6680,5665 6780,5665 6880,5665 6980,5665 7080,5665 7180,5665 7280,5665 7730,5665 7830,5665 5680,5765 5780,5765 5880,5765 5980,5765 6080,5765 6180,5765 6280,5765 6380,5765 6480,5765 6580,5765 6680,5765 6780,5765 6880,5765 6980,5765 7080,5765 7180,5765 7280,5765 7730,5765 7830,5765 7930,5765 8030,5765 8130,5765 8230,5765 8330,5765 8430,5765 8530,5765 8630,5765 8730,5765 8830,5765 5680,5865 5780,5865 5880,5865 5980,5865 6080,5865 6180,5865 6280,5865 6380,5865 6480,5865 6580,5865 6680,5865 6780,5865 6880,5865 6980,5865 7080,5865 7180,5865 7280,5865 7380,5865 7730,5865 7830,5865 7930,5865 8030,5865 8130,5865 8230,5865 8330,5865 8430,5865 8530,5865 8630,5865 8730,5865 8830,5865 8930,5865 9030,5865 9130,5865 9230,5865 9330,5865
I2C_SCL_PC11: J20.8 R38.1 TP54.1 U7.6 | length 708.5
  TOP w6: R38.1@8930,5610 v1(8930,5565) 8955,5565 8985.32,5534.69 U7.6@8985.32,5518.15
  BOTTOM w6: v1(8930,5565) 9130,5765 TP54.1@9280,5765
  BOTTOM w30: TP54.1@9280,5765 9316,5765 9331,5780 J20.8@9420,5780
I2C_SDA_PC10: J20.7 R39.1 TP55.1 U7.4 | length 517
  TOP w6: U7.4@9024.68,5518.15 9024.68,5534.69 9055,5565 v1(9080,5565) R39.1@9080,5610
  BOTTOM w6: v1(9080,5565) 9180,5665 TP55.1@9280,5665
  BOTTOM w30: TP55.1@9280,5665 9316,5665 9331,5680 J20.7@9420,5680
KEY1: R12.2 U3.8 | length 925.8
  TOP w6: U3.8@9314.84,3766.38 9314.84,3710.16 9345,3680 9345,3603.79 9460,3488.79 9460,3390 9487,3363 9512,3363 9560,3315 9560,3149 9461,3050 9445,3050 9430,3035 R12.2@9430,3020
KEY2: R13.2 U3.9 | length 959.2
  TOP w6: U3.9@9295.16,3766.38 9295.16,3704.84 9330,3670 9330,3597.57 9445,3482.57 9445,3385 9480,3350 9505,3350 9545,3310 9545,3155 9460,3070 9440,3070 9420,3050 9395,3050 9380,3035 R13.2@9380,3020
KEY3: R14.2 U3.10 | length 944
  TOP w6: U3.10@9275.47,3766.38 9275.47,3570.47 9190,3485 9190,3395.82 9142,3347.82 9142,3268 9155,3255 9155,3100 9195,3060 9305,3060 9330,3035 R14.2@9330,3020
KEY4: R15.2 U3.11 | length 901.6
  TOP w6: U3.11@9255.79,3766.38 9255.79,3570 9175,3489.21 9175,3397.79 9130,3352.79 9130,3260 9140,3250 9140,3090 9210,3020 R15.2@9280,3020
N299893: C4.1 C5.2 C77.1 J15.1 L1.2 U1.6
  other v1: 8105,4365 8105,4415 8155,4415 7730,4518 7730,4568
N299993: LED1.1 LED2.1 R1.2 | length 177.4
  TOP w10: LED2.1@8330,4744 8330,4742 8357,4715 8404,4715 8430,4741 LED1.1@8430,4744
  TOP w25: R1.2@8280,4745 8304,4745 8305,4744 LED2.1@8330,4744
N300001: LED1.2 U1.2 | length 577.4
  TOP w6: LED1.2@8430,4686 8429,4686 8365,4622 8365,4530 8400,4495 8491.21,4495 8525,4461.21 8525,4325 8515,4315 U1.2@8460,4315
N300005: LED2.2 U1.4 | length 418.3
  TOP w6: LED2.2@8330,4686 8330,4655 8335,4650 8335,4510 8380,4465 8470,4465 8495,4440 8495,4430 8480,4415 U1.4@8460,4415
N300009: R2.2 U1.3 | length 500.2
  TOP w6: R2.2@8380,4685 8380,4665 8350,4635 8350,4520 8390,4480 8485,4480 8510,4455 8510,4372 8503,4365 U1.3@8460,4365
N300295: L2.1 U2.3
N300299: C7.1 C9.1 J24.5 L2.2 R4.2 | length 732.9
  TOP w6: L2.2@8379.5,3715 L2.2@8392,3715
  TOP w25: L2.2@8379.5,3715 8360,3715 8328,3747 8328,3863 8348.51,3883.51 8396.51,3883.51 8493,3980 8725,3980 8735,3970 R4.2@8735,3940 C7.1@8735,3890
N300401: C7.2 R4.1 R5.2 U2.5
N300571: D1.1 L1.1 TP2.1 U1.8
N300731: R3.2 S1.4 | length 143.4
  TOP w20: R3.2@8790,4415 8790,4475 8813.42,4498.43 S1.4@8813.42,4548.7
N300809: LED3.1 R9.2 | length 73
  TOP w6: R9.2@8174,4703 8215,4744 LED3.1@8230,4744
N304262: C23.1 R12.1 S3.1 TP43.1 | length 1560.8
  TOP w6: S3.1@8255,2633.11 8286.89,2665 v1(8315,2665) 8330,2665 8370,2705 8726.36,2705 8826.36,2605 9088.64,2605 9198.64,2715 9355,2715 9405,2765 9405,2865 9410,2870 C23.1@9430,2870 R12.1@9430,2960
  BOTTOM w6: v1(8315,2665) 8315,2630 TP43.1@8330,2615
N304266: C24.1 R13.1 S4.1 TP44.1 | length 1757.5
  TOP w6: S4.1@8005,2633.11 8036.89,2665 v1(8080,2665) 8135,2720 8732.57,2720 8832.57,2620 9082.43,2620 9192.43,2730 9325,2730 9355,2760 9355,2865 9360,2870 C24.1@9380,2870 R13.1@9380,2960
  BOTTOM w6: TP44.1@8080,2615 v1(8080,2665)
N304270: C25.1 R14.1 S5.1 TP46.1 | length 1954.5
  TOP w6: S5.1@7755,2633.11 7786.89,2665 v1(7830,2665) 7900,2735 8738.79,2735 8838.79,2635 9076.21,2635 9186.21,2745 9285,2745 9305,2765 9305,2865 9310,2870 C25.1@9330,2870 R14.1@9330,2960
  BOTTOM w6: TP46.1@7830,2615 v1(7830,2665)
N304274: C26.1 R15.1 S6.1 TP45.1 | length 2116.5
  TOP w6: S6.1@7505,2633.11 7536.89,2665 v1(7580,2665) 7665,2750 8745,2750 8845,2650 9070,2650 9230,2810 9230,2845 9255,2870 C26.1@9280,2870 R15.1@9280,2960
  BOTTOM w6: TP45.1@7580,2615 v1(7580,2665)
N304922: R28.1 U3.2 | length 777.3
  TOP w6: v1(8930,3915) R28.1@8930,3960 ; v1(9430,3715) 9432.95,3717.95 U3.2@9432.95,3766.38
  BOTTOM w6: v1(8930,3915) 8955,3940 9180,3940 9234,3886 9234,3756 9275,3715 v1(9430,3715)
N304990: LED4.1 R28.2 | length 1031.1
  TOP w6: LED4.1@8480,4744 8501,4744 8518,4727 8533,4727 8670,4590 8840,4590 8885,4545 8885,4110 8930,4065 R28.2@8930,4020
N305014: C13.2 U3.3 Y1.2 | length 261.1
  TOP w6: U3.3@9413.27,3766.38 9413.27,3804.38 9438.89,3830 9455,3830 9480,3855 9495,3855 9520,3880 Y1.2@9530,3880 C13.2@9605,3880
N305038: C14.2 U3.4 Y1.1 | length 378.8
  TOP w6: U3.4@9393.58,3766.38 9393.58,3804.38 9435.69,3846.5 9448.5,3846.5 9478,3876 9478,3948 9520,3990 Y1.1@9530,3990 9550,3970 9600,3970 C14.2@9605,3965
N305106: C17.2 U3.5 Y2.3 | length 230.1
  TOP w6: U3.5@9373.9,3766.38 9373.9,3806.1 9345,3835 9345,3872 Y2.3@9329,3888 9329,3904 9340,3915 9370,3915 C17.2@9390,3935
N305110: C19.2 U3.6 Y2.1 | length 404
  TOP w6: C19.2@9170,4036 9225,4036 Y2.1@9231,4042 9280,3993 9280,3855 9295,3840 9318.59,3840 9354.21,3804.38 U3.6@9354.21,3766.38
N305520: R10.2 U3.60 | length 136.8
  TOP w6: U3.60@9531.38,3608.9 9576.1,3608.9 9620,3565 R10.2@9650,3565
N316944: C37.2 S7.2 TP25.1 U4.15 | length 593.7
  TOP w6: v1(6830,2515) 6836.34,2521.34 U4.15@6836.34,2581.3 ; v1(7080,2565) 7085,2570 C37.2@7130,2570 7130,2571.5 7191.61,2633.11 S7.2@7255,2633.11
  BOTTOM w6: v1(6830,2515) 6855,2515 6880,2540 7055,2540 v1(7080,2565) TP25.1@7080,2615
N316972: C28.2 R16.1
N317024: C31.2 R16.2 R29.1
N317324: J17.1 U4.3 | length 182.1
  TOP w6: J17.1@6255,2415 6255,2455 6293.03,2493.03 U4.3@6293.03,2581.3
N317328: J17.2 U4.4 | length 174
  TOP w6: U4.4@6336.34,2581.3 6336.34,2502.66 6355,2484 J17.2@6355,2415
N317424: R20.2 U4.30 | length 121.7
  TOP w6: R20.2@6780,3485 6780,3462 6793.03,3448.97 U4.30@6793.03,3368.7
N317428: R22.2 U4.29 | length 118.9
  TOP w6: R22.2@6830,3485 6830,3462 6836.34,3455.66 U4.29@6836.34,3368.7
N317522: R29.2 U4.53 | length 108.3
  TOP w35: R29.2@6015,2768.31 U4.53@6080.43,2768.31 U4.53@6123.31,2768.31
N317668: R17.2 U4.41 | length 121.7
  TOP w6: R17.2@6280,3485 6280,3435 6293.03,3421.97 U4.41@6293.03,3368.7
N317672: R18.2 U4.40 | length 124
  TOP w6: U4.40@6336.34,3368.7 6336.34,3421.7 6355,3440.36 R18.2@6355,3485
N317676: R19.2 U4.39 | length 127.4
  TOP w6: U4.39@6379.65,3368.7 6379.65,3460.65 6404,3485 R19.2@6405,3485
N320067: C40.2 J12.3 | length 541.4
  TOP w6: J12.3@8560.04,2875.51 8729.97,2875.51 8865.48,2740 9010,2740 C40.2@9035,2765
N320087: C38.1 J12.2 | length 471.3
  TOP w6: J12.2@8560.04,2851.1 8719.86,2851.1 8855.96,2715 C38.1@8975,2715
N320099: C40.1 J12.4 | length 470.8
  TOP w6: J12.4@8560.04,2899.92 8740.08,2899.92 8875,2765 C40.1@8975,2765
N320111: C44.2 C48.2 J12.14
N320135: C41.2 J12.6 | length 470.4
  TOP w6: J12.6@8560.04,2948.74 8610.54,2948.74 8619.27,2940 8735,2940 8860,2815 C41.2@8975,2815
N320243: C42.2 J12.13 | length 416.9
  TOP w6: J12.13@8560.04,3119.6 8944.9,3119.6 8949.5,3115 C42.2@8975,3115
N320247: J12.12 R27.2 | length 427.5
  TOP w6: J12.12@8560.04,3095.19 8909.81,3095.19 8940,3065 R27.2@8975,3065
N320371: C43.2 J12.9 R26.1 | length 509.3
  TOP w6: J12.9@8560.04,3021.96 8748.04,3021.96 8855,2915 R26.1@8975,2915 C43.2@8975,2865
N320409: C38.2 J12.1 | length 541.9
  TOP w6: J12.1@8560.04,2826.69 8709.75,2826.69 8846.44,2690 9010,2690 C38.2@9035,2715
N321112: J13.2 TP35.1 U6.6 | length 722.8
  TOP w6: U6.6@7667.5,4115 v1(7730,4115) 7790,4175 7790,4500 7880.59,4590.59 J13.2@7880.59,4652.56
  BOTTOM w6: v1(7730,4115) 7755,4115 TP35.1@7780,4090
N321160: J13.3 TP36.1 U6.5 | length 651.8
  TOP w6: U6.5@7667.5,4165 v1(7730,4165) 7775,4210 7775,4510 7855,4590 J13.3@7855,4652.56
  BOTTOM w6: v1(7730,4165) TP36.1@7780,4165
N322445: C73.1 R37.2 U7.5 | length 152.2
  TOP w6: U7.5@9005,5518.15 9005,5562 8980,5587 R37.2@8980,5610 C73.1@9030,5610
N322525: J23.1 R44.2 | length 145
  TOP w20: J23.1@8680,5465 R44.2@8680,5610
N322645: J23.5 R46.2 | length 145
  TOP w20: J23.5@8480,5465 R46.2@8480,5610
N322649: J23.3 R45.2 | length 145
  TOP w20: J23.3@8580,5465 R45.2@8580,5610
N322703: LED5.2 R40.2 | length 50.4
  TOP w30: R40.2@7980,5270 8005,5270 8006,5269 LED5.2@8030,5269
N323617: LED6.2 R42.2 | length 50.4
  TOP w30: R42.2@5930,5160 5954,5160 5955,5161 LED6.2@5980,5161
N1290233: Q1.1 R58.2 | length 84.5
  TOP w25: Q1.1@8800,3300 8805,3305 8840,3305 R58.2@8870,3335
N1296945: J24.2 S1.5 | length 10.5
  TOP w6: S1.5@8715,4548.7 8723.7,4548.7 S1.5@8725,4550
NB_AT_RX: C51.2 J3.5 R22.1 | length 1442.4
  TOP w6: R22.1@6830,3545 6830,3568 6862,3600 6880,3600 6935,3655 7075,3655 7130,3600 7576.21,3600 7726.21,3750 7825,3750 7835,3740 C51.2@7835,3715 7835,3675 7880,3630 7880,3540 J3.5@7930,3490
NB_AT_TX: C54.2 J3.6 R20.1 | length 1444.1
  TOP w6: R20.1@6780,3545 6780,3570 6800,3590 6825,3590 6850,3615 6875,3615 6930,3670 7085,3670 7140,3615 7570,3615 7720,3765 7875,3765 7892,3748 C54.2@7892,3715 7892,3666 7930,3628 J3.6@7930,3590
NB_DB_RX: J18.2 U4.19 | length 632.4
  TOP w6: J18.2@6755,2415 6797,2457 6910,2457 6970,2517 6970,2661 6930,2701 6930,2785.05 6956.57,2811.61 U4.19@7009.57,2811.61
NB_DB_TX: J18.1 U4.20 | length 783.4
  TOP w6: J18.1@6655,2415 6655,2450.5 6675.5,2471 6900,2471 6955,2526 6955,2653 6915,2693 6915,2815 6954.92,2854.92 U4.20@7009.57,2854.92
NC7: U6.7
NC8: U6.8
NRST: C22.1 S2.1 TP42.1 U3.7 | length 2323.7
  TOP w6: S2.1@8505,2633.11 8536.89,2665 v1(8565,2665) 8580,2665 8605,2690 8720.14,2690 8820.14,2590 9094.86,2590 9204.86,2700 9395,2700 9455,2760 9455,2865 9460,2870 C22.1@9480,2870 9480,3047.57 9575,3142.57 9575,3320 9520,3375 9495,3375 9475,3395 9475,3495 9360,3610 9360,3685 9334.53,3710.47 U3.7@9334.53,3766.38
  BOTTOM w6: v1(8565,2665) 8565,2630 TP42.1@8580,2615
OLED_SCL: J12.10 R25.1 TP33.1 U3.29 | length 1208.5
  TOP w6: J12.10@8560.04,3046.37 8763.63,3046.37 8845,2965 v1(8930,2965) R25.1@8975,2965 8975,2966 8999,2990 9105,2990 9125,3010 9125,3245 9118,3252 9118,3357.76 9158.62,3398.38 9158.62,3432.8 9140,3451.42 U3.29@9078.62,3451.42
  BOTTOM w6: TP33.1@8880,2940 8905,2965 v1(8930,2965)
OLED_SDA: J12.11 R24.1 TP32.1 U3.30 | length 1107.8
  TOP w6: J12.11@8560.04,3070.78 8774.22,3070.78 8830,3015 v1(8930,3015) R24.1@8975,3015 8975,3016 8999,3040 9100,3040 9110,3050 9110,3235 9105,3240 9105,3361.73 9146.62,3403.35 9146.62,3425.38 9135,3437 9116,3437 9110.73,3431.73 U3.30@9078.62,3431.73
  BOTTOM w6: TP32.1@8880,3015 v1(8930,3015)
PA4: J21.1
PA4_304120: C57.2 J7.1 U3.20 | length 868.7
  TOP w6: J7.1@8990,4320 8950,4280 C57.2@8950,4215 8950,4170 9012.58,4107.42 9012.58,3787.42 9094,3706 9110,3706 9130,3686 9138.7,3686 9152,3672.7 9152,3647 9133.58,3628.58 U3.20@9078.62,3628.58
PA4_322317: J19.1 R43.2 R44.1 R45.1 R46.1 TP56.1 | length 1730.4
  TOP w20: v1(7780,5515) 7935,5670 R46.1@8480,5670 R45.1@8580,5670 R44.1@8680,5670 R43.2@8830,5670
  BOTTOM w24: TP56.1@7780,5065 v1(7780,5515)
  BOTTOM w30: J19.1@7620,5080 7705,5080 7720,5065 TP56.1@7780,5065
PA5: J21.2 R42.1 TP57.1 | length 522.8
  TOP w30: J21.2@5580,5180 5645,5180 5685,5220 R42.1@5930,5220
  BOTTOM w30: J21.2@5580,5180 5665,5180 5680,5165 TP57.1@5730,5165
PA5_304116: C58.2 J7.2 U3.21 | length 880.8
  TOP w6: U3.21@9078.62,3608.9 9138.9,3608.9 9165,3635 9165,3680 9147,3698 9136,3698 9116,3718 9100,3718 9027.58,3790.42 9027.58,4132.58 9075,4180 C58.2@9075,4215 9075,4267 9090,4282 J7.2@9090,4320
PA5_322049: J19.2 R40.1 | length 372.4
  TOP w30: J19.2@7620,5180 7870,5180 7900,5210 R40.1@7980,5210
PA6: J21.3
PA6_304108: C59.2 J7.3 U3.22 | length 995
  TOP w6: U3.22@9078.62,3589.21 9144.21,3589.21 9178,3623 9178,3687 9155,3710 9143,3710 9122,3731 9107,3731 9042.58,3795.42 9042.58,4107.58 9115,4180 9189,4180 9200,4191 C59.2@9200,4215 9200,4272 9190,4282 J7.3@9190,4320
PA6_322317: J19.3
PA7: J21.4
PA7_304104: C60.2 J7.4 U3.23 | length 1137.4
  TOP w6: U3.23@9078.62,3569.53 9149.53,3569.53 9191,3611 9191,3694 9163,3722 9150,3722 9128,3744 9113,3744 9057.58,3799.42 9057.58,4097.58 9125,4165 9200,4165 9210,4175 9309,4175 9325,4191 C60.2@9325,4215 9325,4285 J7.4@9290,4320
PA7_322317: J19.4
PA11: J22.5 R41.2 TP59.1 U8.2 | length 603.8
  TOP w20: U8.2@6980,5365 7085,5470 R41.2@7180,5470 7285,5470 7295,5480 J22.5@7380,5480
  BOTTOM w30: TP59.1@7230,5465 7280,5465 7295,5480 J22.5@7380,5480
PA11_304008: C67.2 J8.5 U3.44 | length 1254.6
  TOP w6: U3.44@9373.9,3313.62 9373.9,3273.9 9343,3243 9258,3243 9230,3215 9230,3155 9270,3115 v1(9380,3115) ; J8.5@9390,2520 9390,2558 9380,2568 C67.2@9380,2610 9410,2610 9430,2630 9430,2705 9470,2745 9500,2745 9520,2765 9520,3055 v1(9530,3065)
  BOTTOM w6: v1(9380,3115) 9380,3110 9425,3065 v1(9530,3065)
PA11_322083: J20.5
PA12: J22.6
PA12_304012: C66.2 J8.6 U3.45 | length 1250.4
  TOP w6: U3.45@9393.58,3313.62 9393.58,3273.58 9350,3230 9265,3230 9245,3210 9245,3165 9270,3140 9405,3140 v1(9430,3115) ; J8.6@9490,2520 9490,2558 9480,2568 C66.2@9480,2610 9510,2610 9520,2620 9520,2705 9535,2720 9535,3020 v1(9580,3065)
  BOTTOM w6: v1(9430,3115) 9440,3105 9550,3105 9580,3075 v1(9580,3065)
PA12_322089: J20.6
PA15: U3.50
PB5: U3.57
PB6: J21.7
PB6_304660: C63.2 J7.7 U3.58 | length 1272.5
  TOP w6: U3.58@9531.38,3569.53 9570.47,3569.53 9585,3555 9585,3535 9620,3500 9770,3500 9805,3535 9805,4100 9685,4220 C63.2@9580,4220 9580,4272 9590,4282 J7.7@9590,4320
PB6_322317: J19.7
PB7: J21.6
PB7_304660: C62.2 J7.6 U3.59 | length 1305.3
  TOP w6: J7.6@9490,4320 9490,4282 9480,4272 C62.2@9480,4220 9510,4220 9540,4190 9680,4190 9780,4090 9780,3540 9760,3520 9625,3520 9600,3545 9600,3565 9575.79,3589.21 U3.59@9531.38,3589.21
PB7_322317: J19.6
PB8: U3.61
PB9: U3.62
PB12: U3.33
PC10: J22.7
PC10_304016: C65.2 J8.7 U3.51 | length 1197.2
  TOP w6: U3.51@9531.38,3431.73 9621.73,3431.73 9630,3440 9699,3440 9705,3434 9705,3300 9605,3200 9605,3040 9555,2990 9555,2715 9540,2700 9540,2625 9555,2610 C65.2@9580,2610 9580,2568 9590,2558 J8.7@9590,2520
PC11: J22.8
PC11_304020: C64.2 J8.8 U3.52 | length 1265.1
  TOP w6: U3.52@9531.38,3451.42 9562.42,3451.42 9567,3456 9585.12,3456 9594.12,3465 9705,3465 9730,3440 9730,3295 9620,3185 9620,3025 9580,2985 9580,2815 9630,2765 9630,2621 9641,2610 C64.2@9680,2610 9680,2568 9690,2558 J8.8@9690,2520
PC12: U3.53
SWCLK: C69.2 J6.2 TP47.1 U3.49 | length 1781
  TOP w6: J6.2@9520,4615 9645,4615 9855,4405 9855,3490 v1(9780,3415) ; U3.49@9531.38,3392.36 9603.36,3392.36 9606,3395 C69.2@9630,3395 9660,3395 v1(9680,3415)
  BOTTOM w6: TP47.1@9520,4535 J6.2@9520,4615 ; v1(9680,3415) v1(9780,3415)
SWDIO: C68.2 J6.4 TP48.1 U3.46 | length 2378.7
  TOP w6: v1(9380,3165) 9360,3185 C68.2@9360,3200 9360,3215 9361.5,3215 9407,3260.5 9407,3275 9413.27,3281.27 U3.46@9413.27,3313.62 ; J6.4@9420,4615 9470,4565 9640,4565 9830,4375 9830,3530 9755,3455 9755,3240 v1(9680,3165)
  BOTTOM w6: v1(9380,3165) 9390,3165 9415,3140 9440,3140 9460,3120 9580,3120 9600,3140 9655,3140 v1(9680,3165) ; TP48.1@9420,4535 J6.4@9420,4615
SWITCH: Q1.3 Q2.1 R36.1 | length 409.4
  TOP w24: v1(8455,3240) R36.1@8500,3240 Q2.1@8500,3300
  BOTTOM w6: v1(8455,3240) 8505,3240 8568,3303 8592,3303 8600,3295 v1(8730,3295)
SWITCH_V3.3: R35.1 R36.2 U3.34 | length 769.2
  TOP w6: U3.34@9177.05,3313.62 9177.05,3267.95 v1(9180,3265)
  TOP w25: R36.2@8560,3240 8560,3260 v1(8580,3280) R35.1@8580,3320
  BOTTOM w6: v1(8580,3280) 8595,3265 8805,3265 8835,3295 9150,3295 v1(9180,3265)
UART1_RX: C49.2 J3.1 U3.43 | length 2144.1
  TOP w6: J3.1@7730,3490 7730,3394 7735,3389 C49.2@7735,3365 7735,3340 7760,3315 7760,3195 7820,3135 8110,3135 v1(8130,3115) ; v1(9230,3115) 9215,3130 9215,3221 9250,3256 9336,3256 9354.21,3274.21 U3.43@9354.21,3313.62
  BOTTOM w6: v1(8130,3115) 8155,3115 8170,3100 9155,3100 9165,3090 9205,3090 v1(9230,3115)
UART1_TX: C56.2 J3.2 U3.42 | length 2196
  TOP w6: J3.2@7730,3590 7780,3540 7780,3415 7800,3395 C56.2@7800,3365 7800,3340 7775,3315 7775,3201.21 7826.21,3150 8115,3150 v1(8130,3165) ; v1(9180,3115) 9200,3135 9200,3230 9239,3269 9327.91,3269 9334.53,3275.62 U3.42@9334.53,3313.62
  BOTTOM w6: v1(8130,3165) 8180,3115 v1(9180,3115)
UART2_RX: C53.2 J3.8 U3.17 | length 1726.3
  TOP w6: v1(8030,3315) 8043,3328 C53.2@8043,3365 8043,3403 8080,3440 8080,3540 J3.8@8030,3590 ; v1(8980,3765) 8995,3750 9030,3750 9055,3725 9055,3690 9057.36,3687.64 U3.17@9078.62,3687.64
  BOTTOM w6: v1(8030,3315) 8055,3340 8165,3340 8205,3380 8205,3588.79 8261.21,3645 8471.21,3645 8536.21,3710 8826.21,3710 8866.21,3750 8938.86,3750 8953.86,3765 v1(8980,3765)
UART2_TX: C52.2 J3.7 U3.16 | length 1733.4
  TOP w6: v1(7980,3315) 7985,3320 C52.2@7985,3365 7985,3395 8030,3440 J3.7@8030,3490 ; v1(9080,3815) 9100,3795 9151,3795 9157.36,3788.64 U3.16@9157.36,3766.38
  BOTTOM w6: v1(7980,3315) 8020,3355 8155,3355 8190,3390 8190,3595 8255,3660 8465,3660 8530,3725 8820,3725 8860,3765 8919,3765 8944,3790 9055,3790 v1(9080,3815)
USIM_CLK: C33.1 J11.5 R17.1 TP62.1 | length 640.2
  TOP w6: R17.1@6280,3545 6280,3590 6305,3615 6580,3615 v1(6605,3640) 6605,3661 6610,3666 C33.1@6610,3690 6610,3752.05 6615,3757.05 J11.5@6615,3825
  BOTTOM w6: v1(6605,3640) 6605,3665 TP62.1@6630,3690
USIM_DATA: C34.1 J11.6 R18.1 TP26.1 | length 644.1
  TOP w6: R18.1@6355,3545 6355,3569 6361,3575 6480,3575 6490,3565 6615,3565 6680,3630 v1(6680,3640) C34.1@6680,3690 6680,3747 6665,3762 J11.6@6665,3825
  BOTTOM w6: v1(6680,3640) 6680,3665 TP26.1@6705,3690
USIM_RST: C35.1 J11.3 R19.1 TP61.1 | length 432.6
  TOP w6: R19.1@6405,3545 C35.1@6455,3545 6479,3545 6484,3540 v1(6505,3540) ; v1(6505,3740) 6515,3750 J11.3@6515,3825
  BOTTOM w6: v1(6505,3540) 6530,3565 6530,3665 TP61.1@6555,3690 v1(6505,3740)
USIM_VDD: C36.1 J11.1 TP30.1 U4.38 | length 132.6
  TOP w30: v1(6422.95,3302.4) U4.38@6422.95,3368.7 v1(6422.95,3435)
  other v1: 6305,3690 6355,3690
V3.3: C39.2 C45.1 C46.2 J8.3 J12.5 J12.8 J24.10 Q2.3 R24.2 R25.2 R26.2 R53.1 TP7.1 U6.4 U6.16 | length 1037.5
  TOP w12: 8447.44,2997.55 J12.8@8560.04,2997.55 8722.44,2997.55 8830,2890 8905,2890 v1(8930,2865) ; 8470.67,2924.33 J12.5@8560.04,2924.33
  TOP w25: R25.2@9035,2965 R26.2@9035,2915 v1(9080,2915) ; R24.2@9035,3015 v1(9080,3015)
  BOTTOM w25: v1(8930,2865) 8955,2890 9055,2890 v1(9080,2915) v1(9080,3015)
  other v1: 8380,2665 8430,2665 8380,2915 8430,2915 7730,3215 7830,3215 7730,3265 7830,3265 7530,3565 7580,3565 7530,3665 7580,3665 7730,4475 7855,4475
V3.3_O: C71.1 C72.1 J20.3 LED5.1 R37.1 R38.2 R39.2 R43.1 TP52.1 U7.1 | length 1017.2
  TOP w30: LED5.1@8030,5211 8901,5211
  BOTTOM w30: TP52.1@9280,5265 9316,5265 9331,5280 J20.3@9420,5280
V3.3_T: C74.1 C75.1 J22.3 LED6.1 R41.1 TP58.1 U8.1 | length 1721.5
  TOP w30: LED6.1@5980,5219 6059,5219 6105,5265 U8.1@6980,5265 7080,5265 7085,5270 C75.1@7180,5270 ; R41.1@7180,5410 C75.1@7180,5270 ; J22.3@7380,5280 7305,5280 7300,5275 C74.1@7255,5275 7220,5275 7215,5270 C75.1@7180,5270
  BOTTOM w30: TP58.1@7230,5265 7280,5265 7295,5280 J22.3@7380,5280
V5.0: C8.1 C70.1 J8.1 J24.1 TP3.1 U2.1 U2.4 | length 317.1
  TOP w20: v1(8455,3890) 8467.6,3877.4 U2.1@8498.82,3877.4
  BOTTOM w10: v1(8455,3890) 8503,3890 8530,3917 8578,3917 8655,3840 v1(8655,3815)
  other v1: 8630,2665 8680,2665 8630,2790 8680,2790 8230,3165 8280,3165
V5.0_O: J20.1
V5.0_T: J22.1
VDD_BC35: C29.2 C30.2 C32.2 E1.1 J24.9 U4.45 U4.46
  other v1: 7430,3865 7680,3865 7430,3915 7680,3915 7430,3965 7680,3965
VUSB: C1.1 C47.2 D5.1 J7.8 J13.1 R1.1 R58.1 R59.1 TP34.1 U1.5 | length 1262.9
  TOP w25: R58.1@8870,3395 R59.1@8870,3450 8870,3510 8920,3560 8920,3830 8980,3890 8980,4085 8910,4155 8910,4390 8955,4435
  TOP w30: D5.1@8256.5,4565 8280,4588.5 R1.1@8280,4685
  other v1: 8205,4490 8255,4490 8680,4618 8680,4668
VUSB_O: J19.8
VUSB_T: J21.8
pads on no net: J6.1 J6.3 J6.5 J6.7 J6.9 J6.10 J11.4 J11.7 J11.8 J13.4 J13.10 J13.11 J24.3 J24.4 J24.7 J24.8 S1.1 S1.2 S1.3 U3.14 U3.15 U3.24 U3.25 U3.26 U3.27 U3.28 U3.35 U3.36 U3.37 U3.38 U3.39 U3.40 U3.41 U3.54 U3.55 U3.56 U4.1 U4.5 U4.6 U4.7 U4.8 U4.9 U4.10 U4.11 U4.12 U4.13 U4.14 U4.16 U4.17 U4.18 U4.21 U4.22 U4.23 U4.24 U4.25 U4.26 U4.27 U4.28 U4.31 U4.32 U4.33 U4.34 U4.35 U4.36 U4.37 U4.44 U4.49 U4.50 U4.55 U4.56 U4.57 U4.58 U4.67 U4.68 U4.69 U4.70 U4.75 U4.76 U4.77 U4.78 U4.79 U4.80 U4.84 U4.85 U4.86 U4.87 U4.88 U4.89 U4.90 U4.91 U6.9 U6.10 U6.11 U6.12 U6.13 U6.14 U6.15 U8.3
copper on no net: | length 1446.8
  TOP w12: 5321,5676 5351,5646 5399,5646 5429,5676 5429,5724 5399,5754 5351,5754 5321,5724 5321,5676 ; 5551,4696 5581,4666 5629,4666 5659,4696 5659,4744 5629,4774 5581,4774 5551,4744 5551,4696 ; 9571,5676 9601,5646 9649,5646 9679,5676 9679,5724 9649,5754 9601,5754 9571,5724 9571,5676 ; 9626,2856 9656,2826 9704,2826 9734,2856 9734,2904 9704,2934 9656,2934 9626,2904 9626,2856

## Polygon pours and split planes (outlines as drawn)
GND on TOP "Drill Drawing-No Net" (hatched 90Degree grid 5 track 5, remove dead copper, pour order 0): 7578.28,4960 7540,4998.28 7540,5861.72 7578.28,5900 9461.72,5900 9500,5861.72 9500,4998.28 9461.72,4960 7578.28,4960
GND on TOP "Drill Drawing-No Net" (hatched 90Degree grid 5 track 5, remove dead copper, pour order 2): 5500,5861.72 5538.28,5900 7421.72,5900 7460,5861.72 7460,4998.28 7421.72,4960 5538.28,4960 5500,4998.28 5500,5861.72
GND on TOP "Drill Drawing-No Net" (solid, remove dead copper, pour order 12): 5744.8,4817.8 9904.8,4817.8 9949.8,4772.8 9949.8,2377.8 9904.8,2332.8 5744.8,2332.8 5744.8,4817.8
GND on BOTTOM "Drill Drawing-No Net" (hatched 90Degree grid 5 track 5, remove dead copper, pour order 4): 7578.28,4960 7540,4998.28 7540,5861.72 7578.28,5900 9461.72,5900 9500,5861.72 9500,4998.28 9461.72,4960 7578.28,4960
GND on BOTTOM "Drill Drawing-No Net" (hatched 90Degree grid 5 track 5, remove dead copper, pour order 6): 5500,5861.72 5538.28,5900 7421.72,5900 7460,5861.72 7460,4998.28 7421.72,4960 5538.28,4960 5500,4998.28 5500,5861.72
GND on BOTTOM "Drill Drawing-No Net" (hatched 90Degree grid 5 track 5, remove dead copper, pour order 14): 5745,4820 9905,4820 9950,4775 9950,2380 9905,2335 5745,2335 5745,4820

## Other copper
TOP:
  drawing of 120 lines, arcs and shapes, not listed
BOTTOM:
  drawing of 113 lines, arcs and shapes, not listed

## Silkscreen, mask and mechanical layers (free items; w line width, h text height)
Top Overlay:
  circle w6: c9850,4720 r75
  circle w6: c9850,2435 r75
  circle w6: c5985,2435 r75
  circle w6: c5980,4720 r75
  region: 6585,2419 6559,2445 6559,2393
  region: 6185,2419 6159,2445 6159,2393
  region: 8750,3586 8776,3560 8776,3612
  region: 7660,3494 7634,3520 7634,3468
  region: 8986,2450 8960,2424 9012,2424
  region: 8990,4390 9016,4416 8964,4416
  text "www.eda365.com" at 6238,5059 h60 r90
  text "www.eda365.com" at 8325,5057 h60 r90
  text "EN-C200-HT_RA1" at 6118,5014 h60 r90
  text "EN-C200-OPT_RA1" at 8205,5012 h60 r90
  text "EN-C200_RA2" at 5574,3168 h60 r90
  text "www.eda365.com" at 5679,3075 h60 r90
  text "ANT1" at 5728,2829 h30 r90